# Allegro board netduino2_20Dec16_0600.brd
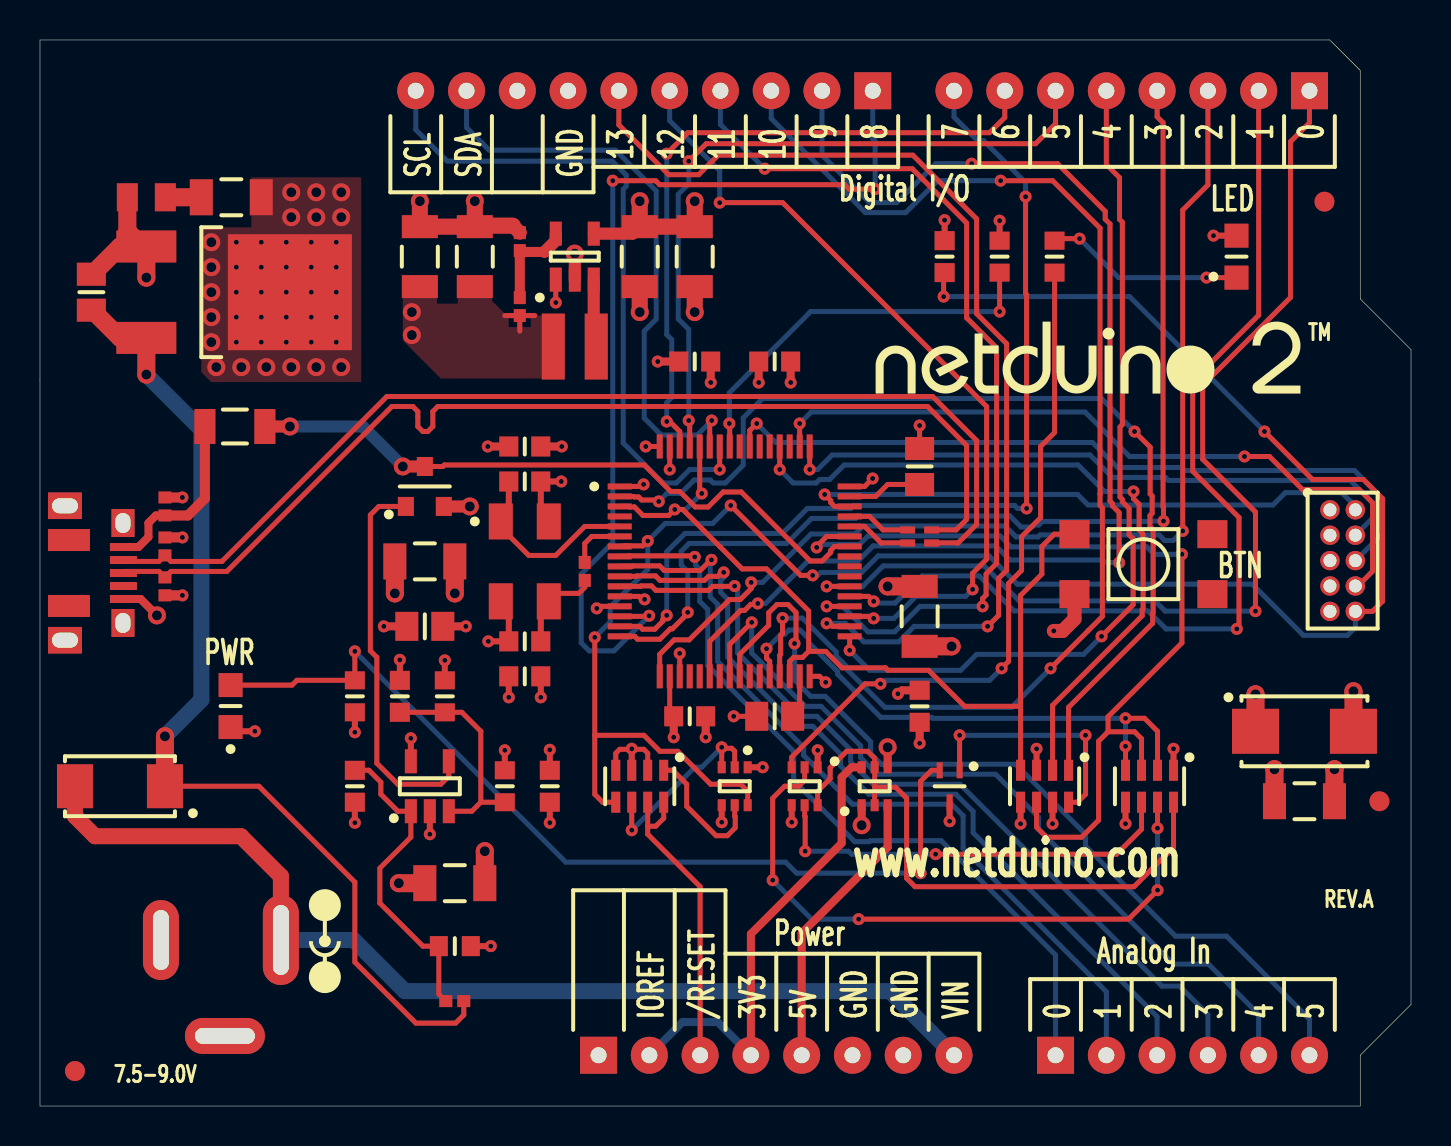
[diagram p0: board, top side]
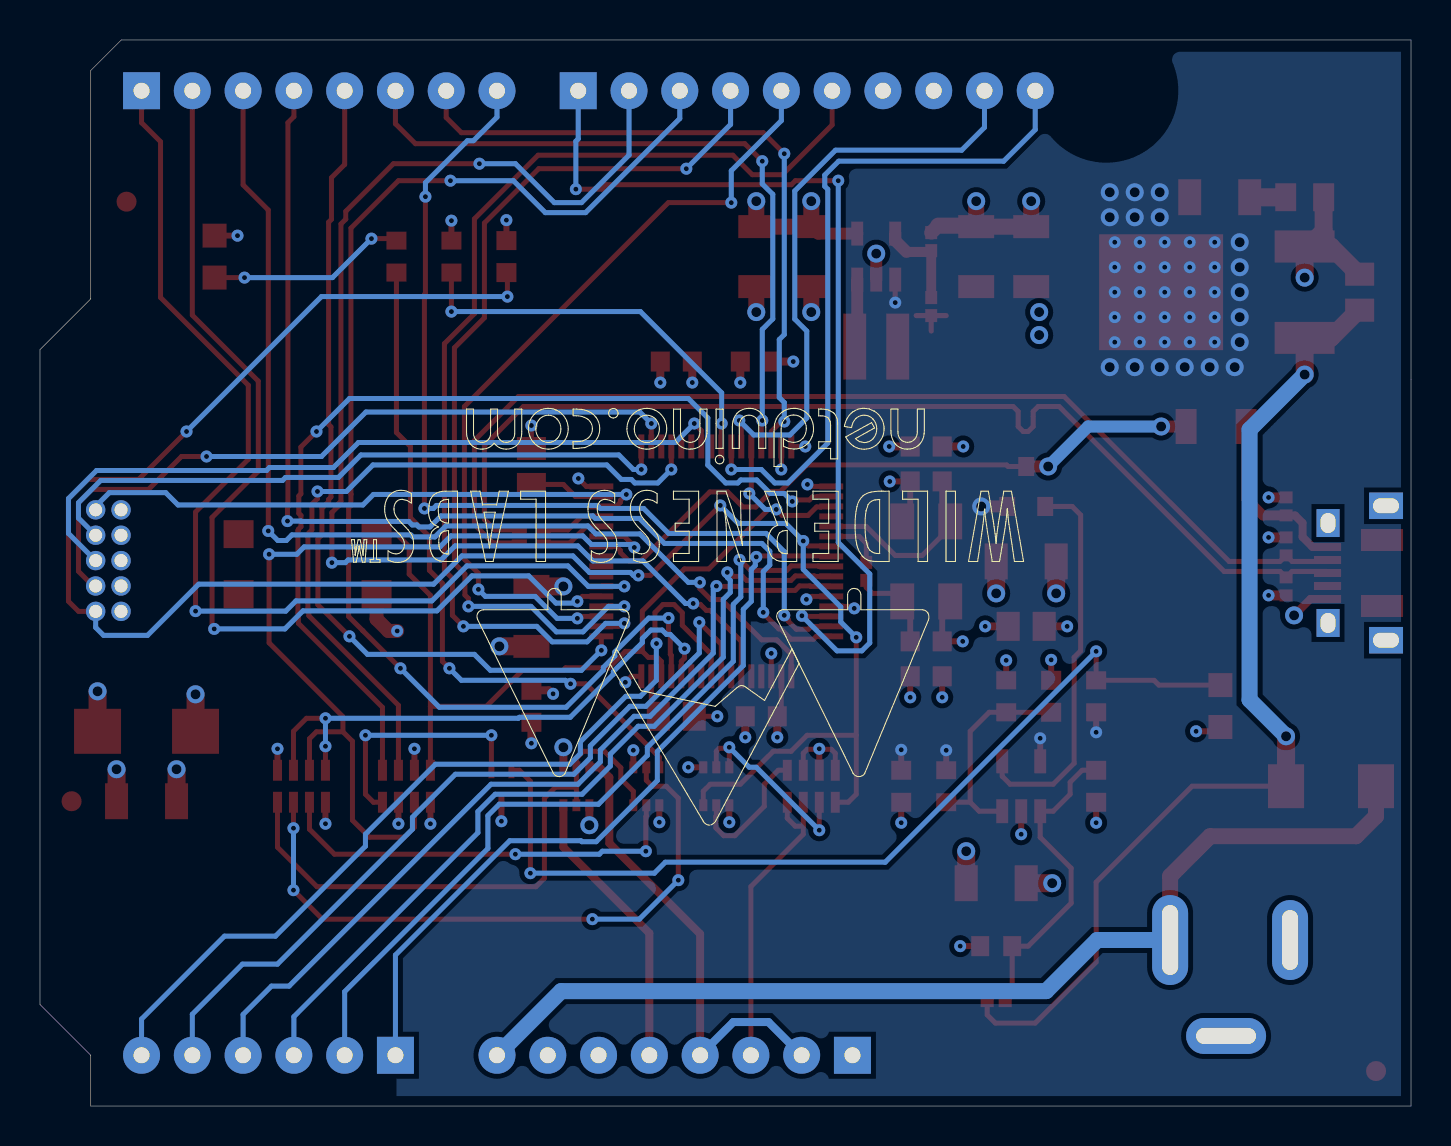
[diagram p1: board, bottom side, seen from below]

Outline 68.58 x 53.34 mm; copper layers: TOP, L2-GND, L3-PWR, BOTTOM. Coordinates in mm from the lower left corner of the outline.
Outline path: 0,53.34 0,0 66.04,0 66.04,2.54 68.58,5.08 68.58,37.85 66.04,40.39 66.04,51.82 64.52,53.34 0,53.34

## Placement (name value [footprint] x y rotation side)
C1  0.47uF  [CAPC2012X125N]  2.57 40.72 90 top
C2  10uF  [CAPC3216X180N]  9.57 45.47 180 top
C3  0.1uF  [CAPC1608X90N]  18 20.5 90 top
C4  0.1uF  [CAPC1608X90N]  25.5 16 270 top
C5  10uF  [CAPC3216X180N]  30 42.5 270 top
C6  10uF  [CAPC3216X180N]  32.75 42.5 270 top
C7  10uF  [CAPC3216X180N]  21.75 42.5 90 top
C8  10uF  [CAPC3216X180N]  19 42.5 90 top
C9  0.1uF  [CAPC1608X90N]  15.75 16 270 top
C10  0.1uF  [CAPC1608X90N]  24.25 33 180 top
C11  0.1uF  [CAPC1608X90N]  32.5 19.5 180 top
C12  0.1uF  [CAPC1608X90N]  44 20 270 top
C13  0.1uF  [CAPC1608X90N]  36.75 37.25 0 top
C14  0.1uF  [CAPC1608X90N]  32.75 37.25 180 top
C15  10uF  [CAPC3216X180N]  44 24.5 90 top
C16  10uF  [CAPC3216X180N]  20.75 11.15 0 top
C17  10uF  [CAPC3216X180N]  19.25 27.25 0 top
C18  2.2uF  [CAPC2012X125N]  44 32 90 top
C19  2.2uF  [CAPC2012X125N]  36.75 19.5 180 top
C20  0.1uF  [CAPC1608X90N]  24.25 21.5 180 top
C21  1uF  [CAPC2012X125N]  19.25 24 180 top
C22  0.1uF  [CAPC1608X90N]  45.25 42.5 90 top
C23  18pF  [CAPC1608X90N]  24.25 31.25 0 top
C24  18pF  [CAPC1608X90N]  24.25 23.25 180 top
C25  100uF  [CAPMP6032X280N]  63.25 18.75 0 top
C26  10uF  [CAPC3216X180N]  63.25 15.25 0 top
D1  -  [SS15-TP]  4 16 180 top
D2  WHITE  [LEDC2012X110N]  9.53 20.01 90 top
D3  BLUE  [LEDC2012X110N]  59.85 42.5 90 top
D4  PGB1010402KR  [RESC1005X40AN]  6.25 30 90 top
D5  PGB1010402KR  [RESC1005X40AN]  6.25 28 90 top
D6  PGB1010402KR  [RESC1005X40AN]  6.25 26 270 top
F1  1206L050YR  [RESC3216X100N]  9.75 34 0 top
F2  FID_1-00_X_2-00  [FID_1-00_X_1-50]  1.75 1.75 0 top
F3  FID_1-00_X_2-00  [FID_1-00_X_1-50]  67 15.25 0 top
F4  FID_1-00_X_2-00  [FID_1-00_X_1-50]  64.25 45.25 0 top
J1  HEADER 3  [ADC-002A-1]  -1.75 8.31 90 top
J2  HDR100IMP08F-G-V-TH-BLUE  [HDR100IMP08F-G-V-TH]  63.5 50.8 180 top
J3  -  [DX4R005JJ2R1800]  0 26.67 270 top
J4  HDR100IMP08F-G-V-TH-BLUE  [HDR100IMP10F-G-V-TH]  41.66 50.8 180 top
J5  HDR100IMP08F-G-V-TH-BLUE  [HDR100IMP06F-G-V-TH]  50.8 2.54 0 top
J6  HDR100IMP08F-G-V-TH-BLUE  [HDR100IMP08F-G-V-TH]  27.94 2.54 0 top
J7  MINI_JTAG_SMD  [MINI_JTAG_TH]  65.16 27.29 0 top
L1  2.2uH  [LQH3NPN2R2NM0L]  26.75 38 180 top
MT1  -  [MTG320H720NP]  15.24 50.8 0 top
MT2  -  [MTG320H720NP]  66.04 35.56 0 top
MT3  -  [MTG320H720NP]  66.04 7.62 0 top
NOREF  -  []  14.25 8.25 90 top
NOREF#2  -  []  0 53.34 0 top
NOREF#3  -  []  0 0 90 top
NOREF#4  -  []  41.8 35.65 0 top
Q1  MMBT3906TT1G  [SOT50P160X90-3N]  45.5 16 270 top
Q2  -  [MBT3904DW1T1G]  34.75 16 270 top
Q3  -  [MBT3904DW1T1G]  38.25 16 270 top
Q4  -  [NTR4101PT1G]  19.25 31 90 top
Q5  -  [NTJD4152PT1G]  41.75 16 90 top
R2  1.5K  [RESC1608]  15.75 20.5 90 top
R3  1K  [RESC2012X70N]  5.32 45.47 0 top
R4  10K  [RESCAV80P160X320X70-8N]  30 16 270 top
R6  1K  [RESC1608]  50.75 42.5 270 top
R8  14K  [CAPC1005X55N]  20.75 5.25 180 top
R9  162K  [CAPC1005X55N]  24 40 90 top
R10  36K  [CAPC1005X55N]  24 43.25 90 top
R11  10K  [RESCAV80P160X320X70-8N]  55.5 16 270 top
R12  10K  [RESCAV80P160X320X70-8N]  50.25 16 270 top
R13  390  [CAPC1005X55N]  27.25 26.75 90 top
R14  22  [EXB24V]  44 28.5 180 top
R27  10K  [RESC1608]  20.25 20.5 90 top
R28  10K  [RESC1608]  20.75 8 0 top
R31  10K  [RESC1608]  23.25 16 270 top
R32  10K  [RESC1608]  48 42.5 270 top
SW1  -  [TSXH-2GL]  55.2 27.11 180 top
U1  MC33269DT-5.0G  [MC33269DT]  5.32 40.72 0 top
U2  -  [ST1S12GR]  26.75 42.5 90 top
U3  LMV7271MF/NOPB  [SOT95P280X145-5N]  19.5 16 90 top
U4  STM32F205RFT6  [STM32F405RGT6]  34.75 27.25 0 top
Y1  25000Mhz  [ABM3B]  24.25 27.25 270 top

## Library data of the parts
C1-C26 = C
D1 = D05AZ75_2
D2 = LED_2
D3 = LED_1
D4-D6 = D05AZ75_1
F1 = FUSE
F2-F4 MT1-MT3 = MOUNT_HOLE
J1 = HEADER 3
J2 J6 = HEADER 8
J3 = HEADER 11_0
J4 = HEADER 10
J5 = HEADER 6
J7 = HEADER 10_2
L1 = L
Q1 = 2N1132_0
Q2 Q3 = MUN5215DW1T1G_6
Q4 = NDF0610/TO_1
Q5 = NTJD4152PT1G
R2 R3 R6 R8-R10 R13 R27 R28 R31 R32 = R
R4 R11 R12 = RESCAV50P80X160X60-8N
R14 = EXB24V
SW1 = SW PUSHBUTTON-SPST-2_0
U1 = LM7805/TO_2
U2 = HEADER 5_2
U3 = LMV321/SO
U4 = STM32F427_2
Y1 = CRYSTAL_0

## Footprints (pads in the part's own frame, mm; a bottom-side part is the same pattern mirrored in y, then rotated)
ABM3B
  rect 1.8x1.2 smd: 1(-2,-1.2) 2(2,-1.2) 3(2,1.2) 4(-2,1.2)
ADC-002A-1
  oval 4.5x1.8 hole 3.5x0.8: 1(0,-13.8)
  oval 1.8x4 hole 0.8x3: 2(-4.8,-11)
  oval 4x1.8 hole 3x0.8: 3(0,-7.8)
CAPC1005X55N
  rect 0.65x0.6 smd: 1(-0.45,0) 2(0.45,0)
CAPC1608X90N
  rect 0.95x1.001 smd: 1(-0.8,0) 2(0.8,0)
CAPC2012X125N
  rect 1.15x1.45 smd: 1(-0.9,0) 2(0.9,0)
CAPC3216X180N
  rect 1.15x1.8 smd: 1(-1.5,0) 2(1.5,0)
CAPMP6032X280N
  rect 2.35x2.25 smd: 1(-2.45,0) 2(2.45,0)
DX4R005JJ2R1800
  rect 0.4x1.35 smd: 1(-1.3,4.175) 2(-0.65,4.175) 3(0,4.175) 4(0.65,4.175) 5(1.3,4.175)
  rect 1.4x1.15 hole 1x0.75: 6(-2.5,4.15) 7(2.5,4.15)
  rect 1.325x1.7 hole 0.75x1.3: 8(-3.362,1.25) 11(3.362,1.25)
  rect 1.1x2.1 smd: 9(-1.65,1.45) 10(1.65,1.45)
EXB24V
  rect 0.75x0.35 smd: 1(-0.6,0.325) 2(-0.6,-0.325) 3(0.6,-0.325) 4(0.6,0.325)
FID_1-00_X_1-50
  round 1 smd: 1(0,0)
HDR100IMP06F-G-V-TH
  rect 1.85x1.85 hole 0.8: 1(0,0)
  round 1.85 hole 0.8: 2(2.54,0) 3(5.08,0) 4(7.62,0) 5(10.16,0) 6(12.7,0)
HDR100IMP08F-G-V-TH
  rect 1.85x1.85 hole 0.8: 1(0,0)
  round 1.85 hole 0.8: 2(2.54,0) 3(5.08,0) 4(7.62,0) 5(10.16,0) 6(12.7,0) 7(15.24,0) 8(17.78,0)
HDR100IMP10F-G-V-TH
  rect 1.85x1.85 hole 0.8: 1(0,0)
  round 1.85 hole 0.8: 2(2.54,0) 3(5.08,0) 4(7.62,0) 5(10.16,0) 6(12.7,0) 7(15.24,0) 8(17.78,0) 9(20.32,0) 10(22.86,0)
LEDC2012X110N
  rect 1.2x1.2 smd: A(1.05,0) C(-1.05,0)
LQH3NPN2R2NM0L
  rect 1.15x3.3 smd: 1(-1.075,0) 2(1.075,0)
MBT3904DW1T1G
  rect 0.6x0.4 smd: 1(-0.95,0.65) 2(-0.95,0) 3(-0.95,-0.65) 4(0.95,-0.65) 5(0.95,0) 6(0.95,0.65)
MC33269DT
  rect 3x1.6 smd: 1(0,2.286) 3(0,-2.286)
  rect 6.2x5.8 smd: 4(7.18,0)
MINI_JTAG_TH
  round 0.97 hole 0.65: 1(-0.635,2.54) 2(0.635,2.54) 3(-0.635,1.27) 4(0.635,1.27) 5(-0.635,0) 6(0.635,0) 7(-0.635,-1.27) 8(0.635,-1.27) 9(-0.635,-2.54) 10(0.635,-2.54)
MTG320H720NP
  round 0 hole 3.2 unplated: (0,0)
NTJD4152PT1G
  rect 0.6x0.4 smd: 1(-0.95,0.65) 2(-0.95,0) 3(-0.95,-0.65) 4(0.95,-0.65) 5(0.95,0) 6(0.95,0.65)
NTR4101PT1G
  rect 0.95x0.8 smd: 1(-1,0.95) 2(-1,-0.95) 3(1,0)
RESC1005X40AN
  rect 0.6x0.65 smd: 1(-0.45,0) 2(0.45,0)
RESC1608
  rect 0.899x1.001 smd: 1(-0.8,0) 2(0.8,0)
RESC2012X70N
  rect 1.05x1.4 smd: 1(-0.95,0) 2(0.95,0)
RESC3216X100N
  rect 1.05x1.75 smd: 1(-1.5,0) 2(1.5,0)
RESCAV80P160X320X70-8N
  rect 1.05x0.45 smd: 1(-0.8,1.2) 2(-0.8,0.4) 3(-0.8,-0.4) 4(-0.8,-1.2) 5(0.8,-1.2) 6(0.8,-0.4) 7(0.8,0.4) 8(0.8,1.2)
SOT50P160X90-3N
  rect 0.8x0.3 smd: 1(-0.8,0.5) 2(-0.8,-0.5) 3(0.8,0)
SOT95P280X145-5N
  rect 1.2x0.6 smd: 1(-1.25,0.95) 2(-1.25,0) 3(-1.25,-0.95) 4(1.25,-0.95) 5(1.25,0.95)
SS15-TP
  rect 1.8x2.2 smd: A(2.25,0) C(-2.25,0)
ST1S12GR
  rect 1.2x0.6 smd: 1(-1.15,0.95) 2(-1.15,0) 3(-1.15,-0.95) 4(1.15,-0.95) 5(1.15,0.95)
STM32F405RGT6
  rect 1.2x0.3 smd: 1(-5.75,3.75) 2(-5.75,3.25) 3(-5.75,2.75) 4(-5.75,2.25) 5(-5.75,1.75) 6(-5.75,1.25) 7(-5.75,0.75) 8(-5.75,0.25) 9(-5.75,-0.25) 10(-5.75,-0.75) 11(-5.75,-1.25) 12(-5.75,-1.75) 13(-5.75,-2.25) 14(-5.75,-2.75) 15(-5.75,-3.25) 16(-5.75,-3.75) 33(5.75,-3.75) 34(5.75,-3.25) 35(5.75,-2.75) 36(5.75,-2.25) 37(5.75,-1.75) 38(5.75,-1.25) 39(5.75,-0.75) 40(5.75,-0.25) 41(5.75,0.25) 42(5.75,0.75) 43(5.75,1.25) 44(5.75,1.75) 45(5.75,2.25) 46(5.75,2.75) 47(5.75,3.25) 48(5.75,3.75)
  rect 0.3x1.2 smd: 17(-3.75,-5.75) 18(-3.25,-5.75) 19(-2.75,-5.75) 20(-2.25,-5.75) 21(-1.75,-5.75) 22(-1.25,-5.75) 23(-0.75,-5.75) 24(-0.25,-5.75) 25(0.25,-5.75) 26(0.75,-5.75) 27(1.25,-5.75) 28(1.75,-5.75) 29(2.25,-5.75) 30(2.75,-5.75) 31(3.25,-5.75) 32(3.75,-5.75) 49(3.75,5.75) 50(3.25,5.75) 51(2.75,5.75) 52(2.25,5.75) 53(1.75,5.75) 54(1.25,5.75) 55(0.75,5.75) 56(0.25,5.75) 57(-0.25,5.75) 58(-0.75,5.75) 59(-1.25,5.75) 60(-1.75,5.75) 61(-2.25,5.75) 62(-2.75,5.75) 63(-3.25,5.75) 64(-3.75,5.75)
TSXH-2GL
  rect 1.5x1.4 smd: 1(-3.45,1.5) 2(3.45,1.5) 3(-3.45,-1.5) 4(3.45,-1.5)

## Nets
+3.3V: C7.1 C8.1 C10.1 C11.1 C12.1 C13.1 C14.1 C15.1 C16.1 C17.1 C20.1 C21.1 C25.1 C26.1 J7.1(VCC) L1.2 Q5.1(SOURCE) R4.2(1) R4.3(1) R4.4(1) R9.1 R12.3(1) R32.1 SW1.2 U4.1(VBAT) U4.13(VDDA) U4.19(VDD1) U4.32(VDD2) U4.48(VDD3) U4.64(VDD4)
+3V3_HEADER: J6.2 J6.4 Q5.6(DRAIN)
+5.0V: C2.1 C4.1 C5.1 C6.1 D3.A(ANODE) Q4.2(SOURCE) Q5.4(SOURCE) R2.1 R11.1 R31.1 U1.4(VOUT) U2.1(EN) U2.4(VIN) U3.5(+VCC)
+5V_HEADER: J6.5 Q5.3(DRAIN)
+VIN: D1.A(1) J1.1 J6.8
+VIN_PROTECTED: C1.1 D1.C(2) R8.1 U1.3(VIN)
GND: C1.2 C3.2 C4.2 C5.2 C6.2 C7.2 C8.2 C9.2 C10.2 C11.2 C12.2 C13.2 C14.2 C15.2 C16.2 C17.2 C18.2 C19.2 C20.2 C21.2 C22.2 C23.2 C24.2 C25.2 C26.2 D2.C(CATHODE) D4.2 D5.2 D6.2 J1.2 J1.3 J3.5(GND) J4.7 J6.6 J6.7 J7.3(GND1) J7.5(GND2) J7.7(GND3) J7.9(GND4) Q1.3(COLLECTOR) Q2.1(E) Q2.4(E) Q3.1(E) Q3.4(E) R3.1 R10.2 R11.5(2) R12.5(2) R12.7(2) R27.2 R28.2 U1.1(GND) U2.2(GND) U3.2(-VCC) U4.12(VSSA) U4.18(VSS1) U4.63(VSS2) Y1.2 Y1.4
VIN_COMP: C9.1 R8.2 R28.1 U3.1(+VIN)
VIN_COMP_LOGIC: Q4.1(GATE) U3.4(OUT)
VIN_REF: C3.1 R27.1 R31.2 U3.3(-VIN)
/EXTERNAL_RESET: J6.3 R4.7(2) R4.8(2)
/PWR_CTRL_HEADERS: Q3.6(C) Q5.2(GATE) Q5.5(GATE) R11.8(2)
/PWR_LED_OFF: R12.1 U4.2(PC13)
/RESET_MCU: C22.1 J7.10(NRST) Q2.6(C) R4.5(2) U4.7(\\R\S\T)
A0: J5.1 U4.8(PC0)
A1: J5.2 U4.9(PC1)
A2: J5.3 U4.10(PC2)
A3: J5.4 U4.11(PC3)
A4: J5.5 U4.24(PC4)
A5: J5.6 U4.25(PC5)
CTRL_OF_PWR_HEADERS: R11.2(1) R11.4(1) U4.28(PB2/BOOT1)
D0: J2.1 U4.38(PC7/TIM3_CH2)
D1: J2.2 U4.37(PC6/TIM3_CH1)
D2: J2.3 U4.17(PA3/USART2_RX)
D3: J2.4 U4.16(PA2/USART2_TX)
D4: J2.5 U4.33(PB12)
D5: J2.6 U4.61(PB8/TIM4_CH3)
D6: J2.7 U4.62(PB9/TIM4_CH4)
D7: J2.8 U4.15(PA1/USART4_RX)
D8: J4.1 U4.14(PA0/USART4_TX)
D9: J4.2 U4.22(PA6/SPI1_MISO)
D10: J4.3 U4.29(PB10/USART3_TX)
D11: J4.4 U4.36(PB15/SPI2_MOSI)
D12: J4.5 U4.35(PB14/SPI2_MISO)
D13: J4.6 U4.34(PB13/SPI2_SCK)
DCDC_FB: R9.2 R10.1 U2.5(FB)
JTCK: J7.4(JTCK) U4.49(PA14/JTCK-SWCLK)
JTDI: J7.8(JTDI) U4.50(PA15/JTDI)
JTDO: J7.6(JTDO) U4.55(PB3/JTDO/TRACESW0)
JTMS: J7.2(JTMS) U4.46(PA13/JTMS-SWDIO)
LED: R11.3(1) R12.6(2) U4.43(PA10/OTG_FS_ID)
OSC_IN: C23.1 U4.5(PH0/OSC_IN) Y1.1
OSC_OUT: R13.2 U4.6(PH1/OSC_OUT)
OTG_FS_DM: R14.4(2) U4.44(PA11/OTG_FS_DM)
OTG_FS_DP: R14.3(2) U4.45(PA12/OTG_FS_DP)
SCL: J4.10 U4.58(PB5/CAN2_TX/TIM4_CH1)
SDA: J4.9 U4.59(PB7/TIM4_CH2)
SWITCH1: R12.4(1) SW1.4 U4.3(PC14) U4.30(PB11/USART3_RX) U4.60(BOOT0)
USB5V: D4.1 F1.1 J3.1(VBUS)
USB5V_F: F1.2 Q4.3(DRAIN) U4.42(PA9/OTG_FS_VBUS)
USB_D+: D6.1 J3.3(D+) R14.2(1)
USB_D-: D5.1 J3.2(D-) R14.1
VCAP_1: C19.1 U4.31(VCAP_1)
VCAP_2: C18.1 U4.47(VCAP_2)
N62753: Q2.2(B) Q2.3(C) R4.6(2)
N62801: D3.C(CATHODE) R6.1
N63121: C24.1 R13.1 Y1.3
N63233: C2.2 R3.2
N74908: Q3.3(C) R6.2
N236614: D2.A(ANODE) Q1.2(EMITTER) R2.2
N237577: Q1.1(BASE) R12.8(2)
N238352: Q3.5(B) R11.6(2)
N238638: Q2.5(B) R4.1
N251644: Q3.2(B) R11.7(2)
N267238: R12.2(1) U4.52(PC11/USART3_RX)
N269112: R32.2 U4.57(PB5/CAN2_RX/SPI3_MOSI)
N1930270: L1.1 U2.3(SW)

Pads without a net: F2 1; F3 1; F4 1; J3 4 6 7 8 9 10 11; J4 8; J6 1; SW1 1 3; U4 4 20 21 23 26 27 39 40 41 51 53 54 56

## Via types
v1: diameter 0.6, hole 0.25, TOP to BOTTOM, 163 vias
v2: diameter 0.9, hole 0.5, TOP to BOTTOM, 45 vias

## Routing (per net, layer and track width the routed paths; a pad name or vN(x,y) marks a point on that pad's centre or on a via; arc(x,y) is an arc through that point)
+3.3V: length 34.5
  TOP w0.25: U4.1 30.09,31 v1(30.19,31.1) ; U4.32 39,21.5 v1(39.3,21.2) ; v1(41.65,31.4) 41.25,31 U4.48 ; R4.2 30.4,17.65 30.2,17.85 29.62,17.85 v1(29.6,17.88) 29.57,17.85 29,17.85 28.8,17.65 R4.4 ; v1(27.85,24.9) 27.95,25 U4.13 ; U4.19 v1(32,22.65) ; U4.64 v1(30.3,33)
  TOP w0.254: 23.25,39.55 R9.1 ; R9.1 24,38.78 ; R9.1 24.75,39.55
  TOP w0.3: C20.1 v1(25.05,20.45) ; R12.3 v1(49.85,17.88) ; R32.1 v1(48,44.3) ; R4.3 v1(29.6,17.88)
  TOP w0.4: Q5.1 v2(41.1,14.05) ; C11.1 v1(33.3,18.45) ; C10.1 v1(26.1,33) ; C14.1 v1(33.55,36.2) ; v1(42.91,20.63) 42.95,20.63 43.12,20.8 C12.1 ; C13.1 v1(35.95,36.2) ; C21.1 v1(21.3,24)
  TOP w0.7: v1(50.71,23.77) 51.15,23.77 51.74,24.36 SW1.2
  TOP w0.9: C26.1 v2(61.75,16.85) ; C16.1 v2(17.95,11.15) ; C25.1 v2(60.8,20.6) ; C15.1 v2(45.6,23) ; C17.1 v2(17.75,25.65)
  vias: v2(18.6,39.73) v2(18.6,38.58)
+3V3_HEADER: length 23.5
  TOP w0.4: J6.4 35.56,8.61 40.1,13.15 40.1,16.45 40.6,16.95 Q5.6
  BOTTOM w0.4: J6.4 33.9,4.2 32.14,4.2 J6.2
+5.0V: length 17.6
  TOP w0.25: U2.1 v1(25.8,40.2)
  TOP w0.3: R11.1 v1(56.7,17.88) ; D3.A v1(58.7,43.55) ; R31.1 v1(23.25,17.8) ; U3.5 v1(18.55,18.4) ; C4.1 v1(25.5,17.82) ; R2.1 v1(15.75,18.7)
  TOP w0.4: Q5.4 v2(42.4,17.95)
  TOP w0.6: C5.1 29.65,43.65 U2.4 ; Q4.2 v2(21.5,30)
  TOP w0.8: v2(30,45.27) C5.1 C6.1 v2(32.75,45.27)
  vias: v1(9.82,43.22) v1(9.82,41.97) v1(9.82,40.72) v1(9.82,39.47) v1(9.82,38.22) v1(11.07,43.22) v1(11.07,41.97) v1(11.07,40.72) v1(11.07,39.47) v1(11.07,38.22) v1(12.32,43.22) v1(12.32,41.97) v1(12.32,40.72) v1(12.32,39.47) v1(12.32,38.22) v1(13.57,43.22) v1(13.57,41.97) v1(13.57,40.72) v1(13.57,39.47) v1(13.57,38.22) v1(14.82,43.22) v1(14.82,41.97) v1(14.82,40.72) v1(14.82,39.47) v1(14.82,38.22) v2(8.57,43.22) v2(8.57,41.97) v2(8.57,40.72) v2(8.57,39.47) v2(8.57,38.22) v2(8.82,36.97) v2(10.07,36.97) v2(11.32,36.97) v2(12.57,45.72) v2(12.57,44.47) v2(12.57,36.97) v2(13.82,45.72) v2(13.82,44.47) v2(13.82,36.97) v2(15.07,45.72) v2(15.07,44.47) v2(15.07,36.97)
+5V_HEADER: length 14.3
  TOP w0.4: Q5.3 42.4,12.95 38.1,8.65 J6.5
+VIN: length 52.3
  TOP w0.8: D1.A 1.75,14.5 2.75,13.5 10.05,13.5 12.05,11.5 J1.1
  BOTTOM w0.8: J1.1 15.69,8.31 18.25,5.75 42.51,5.75 J6.8
+VIN_PROTECTED: length 50.7
  TOP w0.25: R8.1 21.2,4.56 20.79,4.15 18.8,4.15 15.75,7.2 15.75,11.2 10.95,16 D1.C
  TOP w0.9: C1.1 2.62,39.82 4.01,38.43 U1.3 v2(5.32,36.6) ; D1.C v2(6.25,18.5)
  BOTTOM w0.8: v2(5.32,36.6) 8.07,33.84 8.07,20.32 v2(6.25,18.5)
GND: length 69
  TOP w0.25: C11.2 31.5,19.7 U4.18 ; v1(30.24,25.35) 30.18,25.41 30.05,25.41 29.96,25.5 U4.12 ; U4.63 v1(31.5,31.85) ; C19.2 v1(34.7,19.5) ; C18.2 v1(44,34.05)
  TOP w0.3: R11.5 v1(54.3,14.12) ; Y1.4 25.05,29.65 C23.2 v1(26.07,31.25) ; U3.2 v1(19.5,13.6) ; Q3.1 v1(38.9,17.8) ; C20.2 v1(23.45,20.45) ; Y1.2 23.45,24.85 C24.2 v1(22.43,23.25) ; C3.2 v1(18,22.32) ; D2.C 9.75,18.75 v1(10.75,18.75) ; Q2.4 v1(34.1,14.2) ; Q1.3 v1(45.5,14.25) ; C4.2 v1(25.5,14.18) ; R27.2 v1(20.25,22.3) ; R28.2 v1(22.55,8) ; C22.2 v1(45.25,44.33) ; Q3.4 v1(37.6,14.2) ; R12.5 v1(49.05,14.12) ; Q2.1 v1(36.15,16.95) ; C9.2 v1(15.75,14.18) ; R12.7 v1(50.65,14.12)
  TOP w0.4: C21.2 v1(17.2,24) ; v2(5.85,24.55) 5.03,25.37 J3.5 ; C14.2 v1(30.9,37.25) ; C10.2 v1(22.4,33) ; C12.2 v1(44,18.15) ; C11.2 v1(31.7,18.45) ; C13.2 v1(37.55,36.2)
  TOP w0.5: D4.2 v1(7.12,30.45) ; D5.2 v1(7.12,28.45) ; D6.2 v1(7.12,25.55)
  TOP w0.6: U2.2 v2(26.75,42.65)
  TOP w0.7: R10.2 23.65,44.05
  TOP w0.8: C7.2 v2(21.75,45.27) ; C7.2 C8.2 v2(19,45.27) ; C7.2 21.8,44.05 23.65,44.05 ; C6.2 v2(32.75,39.73) ; C5.2 v2(30,39.73)
  TOP w0.9: C16.2 v2(22.25,12.75) ; R3.1 4.37,43.77 5.13,43.01 ; C17.2 v2(20.75,25.65) ; 5.13,43.01 U1.1 v2(5.32,41.45) ; 5.13,43.01 4.01,43.01 2.62,41.62 C1.2 ; C26.2 v2(64.75,16.85) ; C15.2 v2(42.4,26) ; C25.2 v2(65.7,20.75)
VIN_COMP: length 16
  TOP w0.25: C9.1 16.45,16.8 17.05,16.2 17.05,15.6 17.9,14.75 U3.1 18.55,13.45 17,11.9 17,10.15 19.15,8 R28.1 19.95,5.6 R8.2
VIN_COMP_LOGIC: length 19.5
  TOP w0.25: U3.4 20.45,16.5 20.05,16.1 17.9,16.1 16.85,17.15 16.85,22.45 16.52,22.77 16.52,29.57 16.95,30 Q4.1
VIN_REF: length 11
  TOP w0.25: 22.05,15.2 R31.2 ; 22.05,15.2 22.05,18.75 21.1,19.7 R27.1 C3.1 ; 22.05,15.2 21.6,14.75 U3.3
/EXTERNAL_RESET: length 15.5
  TOP w0.25: R4.8 31.2,14.4 30.8,14 30.4,14 ; 30.4,14 R4.7 ; 30.4,14 30.4,13.6 33.02,10.98 J6.3
/PWR_CTRL_HEADERS: length 29.6
  TOP w0.25: R11.8 56.7,12.95 54.73,10.97 43.77,10.97 43.35,11.4 43.35,15.4 42.8,15.95 41.75,15.95 ; Q3.6 38.9,15.75 39.52,16.38 39.52,16.93 40.35,17.75 41.4,17.75 41.75,17.4 Q5.5 41.75,15.95 ; 41.75,15.95 Q5.2
/PWR_LED_OFF: length 49.4
  TOP w0.25: R12.1 51.45,19.95 55.65,24.15 55.65,24.64 55.68,24.66 55.68,28.79 55.65,28.82 55.65,28.86 55.52,28.99 55.52,29.55 55.63,29.65 55.63,30.52 55.53,30.63 55.53,32.97 v1(54.75,33.75) ; v1(30.95,30.25) 30.88,30.32 30.09,30.32 29.94,30.48 29.72,30.48 29.7,30.5 U4.2
  BOTTOM w0.25: v1(54.75,33.75) 53.1,35.4 36.15,35.4 35.17,34.43 35.17,32.07 34.28,31.18 33.67,31.18 33.52,31.32 32.73,31.32 32.05,30.65 31.35,30.65 v1(30.95,30.25)
/RESET_MCU: length 100.7
  TOP w0.25: 27.75,18.55 30.21,18.55 31.01,17.75 31.9,17.75 33.55,16.1 35.05,16.1 35.4,15.75 Q2.6 ; 27.75,18.55 v1(27.75,23.45) ; 27.75,18.55 27.75,15.6 28.15,15.2 R4.5 ; v1(34.55,30.05) 38.05,26.55 v1(38.65,26.55) ; C22.1 45.2,41.65 v1(45.2,40.5) ; v1(61.25,33.75) 63.65,31.35 66.2,31.35 67.16,30.39 67.16,25.25 66.65,24.75 J7.10 ; U4.7 29.21,28 29.23,28.02 30.15,28.02 v1(30.4,28.27)
  BOTTOM w0.25: v1(34.55,30.05) 33.65,29.15 31.28,29.15 v1(30.4,28.27) 30.4,26.85 28.52,24.98 28.52,24.23 v1(27.75,23.45) ; v1(45.2,40.5) 54.5,40.5 v1(61.25,33.75) ; v1(38.65,26.55) 38.9,26.55 39.05,26.7 41.1,26.7 41.92,27.52 47.48,27.52 48.89,26.11 60.64,26.11 63.2,23.55 65.4,23.55 65.8,23.95 J7.10
A0: length 38.8
  TOP w0.25: U4.8 29.41,27.5 29.44,27.52 32.7,27.52 v1(32.75,27.48)
  BOTTOM w0.25: J5.1 50.8,7.55 45.08,13.28 41.52,13.28 41.48,13.22 40.76,13.22 37.7,16.28 37.7,17.74 33.4,22.04 33.4,24.85 33,25.25 33,26.85 32.8,27.05 32.8,27.43 v1(32.75,27.48)
A1: length 40.8
  TOP w0.25: U4.9 29.62,27 29.65,27.02 31,27.02 31.22,26.8 33.03,26.8 33.56,27.33 v1(33.59,27.33)
  BOTTOM w0.25: v1(33.59,27.33) 33.52,27.27 33.52,25.48 33.9,25.1 33.9,22.25 38.2,17.95 38.2,17.55 40.65,15.1 45.6,15.1 46.17,14.53 46.17,12.89 53.34,5.72 J5.2
A2: length 41.7
  TOP w0.25: v1(34.2,26.7) 34.1,26.7 33.9,26.5 33.44,26.5 33.24,26.3 31.02,26.3 30.79,26.52 29.85,26.52 29.83,26.5 U4.10
  BOTTOM w0.25: J5.3 55.88,4.47 46.67,13.68 46.67,14.74 45.81,15.6 41.46,15.6 40.05,17.01 40.05,17.6 38.65,19 37.86,19 34.4,22.46 34.4,25.35 34.05,25.7 34.05,26.3 34.2,26.45 v1(34.2,26.7)
A3: length 42.8
  TOP w0.25: v1(34.75,26.02) 34.73,26 33.64,26 33.44,25.8 30.81,25.8 30.58,26.02 30.06,26.02 30.04,26 U4.11
  BOTTOM w0.25: J5.4 58.42,4.58 57,6 56.12,6 46.02,16.1 41.67,16.1 40.55,17.22 40.55,17.81 38.86,19.5 38.06,19.5 34.9,22.66 34.9,25.86 v1(34.75,26.02)
A4: length 40.3
  TOP w0.25: U4.24 34.5,23.1 v1(35.6,24.2)
  BOTTOM w0.25: J5.5 60.96,4.59 58.45,7.1 56.7,7.1 49.95,13.85 49.95,14.45 47.8,16.6 41.88,16.6 41.05,17.43 41.05,18.02 39.07,20 38.27,20 36.06,22.21 35.6,22.67 v1(35.6,24.2)
A5: length 44.2
  TOP w0.25: U4.25 35,22.6 36.45,24.05 36.45,24.68 36.86,25.09 37.42,25.09 37.82,24.69 37.82,23.22 v1(37.74,23.14)
  BOTTOM w0.25: v1(37.74,23.14) 37.75,23.13 37.75,21.3 38.55,20.5 39.28,20.5 41.55,18.23 41.55,17.63 42.08,17.1 48.8,17.1 52.3,13.6 52.3,13 56.8,8.5 59.35,8.5 63.5,4.35 J5.6
CTRL_OF_PWR_HEADERS: length 28.2
  TOP w0.25: v1(54.3,19.4) 55.25,19.4 55.9,18.75 R11.2 ; v1(54.3,18) R11.4 ; U4.28 36.5,22.25 36.34,22.41 v1(36.34,22.88)
  BOTTOM w0.25: v1(36.34,22.88) 37.06,23.6 37.25,23.6 37.46,23.82 38.02,23.82 38.45,23.39 38.45,23.19 39.9,21.74 39.9,21.61 42.06,19.45 44.6,19.45 44.65,19.4 v1(54.3,19.4) v1(54.3,18)
D0: length 53.3
  TOP w0.25: v1(60.8,24.76) 60.8,29.72 58.16,32.36 58.16,36.07 62.55,40.45 62.55,48.25 63.5,49.2 J2.1 ; U4.38 v1(39.35,26)
  BOTTOM w0.25: v1(60.8,24.76) 56.29,24.76 55.77,25.27 48.98,25.27 47.23,27.02 42.17,27.02 41.15,26 v1(39.35,26)
D1: length 50.5
  TOP w0.25: v1(41.7,25.25) 41.45,25.5 U4.37 ; J2.2 60.96,39.57 57.66,36.27 57.66,31.76 59.98,29.45 59.98,23.98 v1(59.87,23.87)
  BOTTOM w0.25: v1(59.87,23.87) 56.33,23.87 55.42,24.77 48.73,24.77 46.98,26.52 44.13,26.52 42.77,25.17 41.78,25.17 v1(41.7,25.25)
D2: length 53.2
  TOP w0.25: v1(57.16,28.77) 57.16,44.83 58.42,46.09 J2.3 ; v1(35.58,26.2) 35.58,25.89 35.02,25.34 34.49,25.34 32.48,23.32 31.72,23.32 31,22.6 U4.17
  BOTTOM w0.25: v1(57.16,28.77) 56.68,28.3 56.26,28.3 55.98,28.57 50.02,28.57 49.92,28.48 48.83,28.48 48.27,29.02 41.17,29.02 40.77,28.62 38.57,28.62 36.15,26.2 v1(35.58,26.2)
D3: length 54.1
  TOP w0.25: v1(56.2,29.27) 56.2,29.94 56.18,29.97 56.18,49.2 55.88,49.5 J2.4 ; v1(32.4,24.7) 32.4,24.65 31.63,23.88 31.52,23.88 31.01,23.36 29.89,23.36 29.75,23.5 U4.16
  BOTTOM w0.25: v1(32.4,24.7) 32.4,26.74 32.08,27.07 32.08,27.75 32.47,28.15 37.34,28.15 38.59,29.4 40.8,29.4 40.92,29.52 48.52,29.52 49.07,28.98 49.63,28.98 49.73,29.07 49.96,29.07 50.14,29.25 55.51,29.25 55.52,29.27 v1(56.2,29.27)
D4: length 43
  TOP w0.25: U4.33 v1(40.5,22.8) ; v1(53.1,23.5) 54.68,25.08 54.68,28.38 54.48,28.58 54.48,29.9 54.14,30.24 54.14,30.35 54.02,30.47 54.02,33.98 54.14,34.1 54.14,44.22 54,44.36 54,46.45 53.34,47.11 J2.5
  BOTTOM w0.25: v1(53.1,23.5) 52.2,22.6 46.85,22.6 46.05,21.8 41.5,21.8 v1(40.5,22.8)
D5: length 35.5
  TOP w0.25: v1(32.45,34.3) 32.45,34.28 32.5,34.23 U4.61 ; v1(32.45,47.27) 33.33,48.15 49.8,48.15 50.8,49.15 J2.6
  BOTTOM w0.25: v1(32.45,47.27) 32.45,46.14 31.93,45.62 31.93,39.38 32.45,38.86 v1(32.45,34.3)
D6: length 34.2
  TOP w0.25: J2.7 48.26,49.46 47.5,48.7 32.4,48.7 v1(31.35,47.65) ; U4.62 32,33.75 31.5,34.25 v1(31.35,34.25)
  BOTTOM w0.25: v1(31.35,34.25) 31.35,35.2 31.6,35.45 31.6,38.35 31.35,38.6 v1(31.35,47.65)
D7: length 47.5
  TOP w0.25: v1(49.3,45.5) 49.3,40.65 49.35,40.6 v1(49.35,29.9) ; v1(31.35,24.55) 31.15,24.35 31.15,24.26 30.75,23.86 30.14,23.86 30,24 U4.15
  BOTTOM w0.25: J2.8 45.72,49.48 46.9,48.3 47.2,48.3 49.3,46.2 v1(49.3,45.5) ; v1(31.35,24.55) 31.35,27.74 32.26,28.65 37.14,28.65 38.39,29.9 40.55,29.9 40.7,30.05 48.75,30.05 48.9,29.9 v1(49.35,29.9)
D8: length 47.8
  TOP w0.25: v1(30.47,24.53) 30.44,24.5 U4.14 ; v1(41.77,45.88) 40.48,45.88 40.25,46.1 30.99,46.1 30.79,46.3 v1(28.65,46.3)
  BOTTOM w0.25: J4.1 41.66,48.39 41.77,48.27 v1(41.77,45.88) ; v1(30.47,24.53) 28.71,22.77 27.47,22.77 27.07,23.17 27.07,26.62 28.65,28.2 v1(28.65,46.3)
D9: length 62.6
  TOP w0.25: v1(46.6,47.15) 50.9,47.15 53.28,44.77 53.28,44.37 53.52,44.13 53.52,30.82 53.52,30.26 53.64,30.15 53.64,30.03 53.98,29.69 v1(53.98,27.19) ; v1(35.9,25.15) 35.86,25.1 35.55,25.1 35.25,24.8 35.05,24.8 33.5,23.25 U4.22
  BOTTOM w0.25: v1(46.6,47.15) 44.8,47.15 42.85,45.2 41.5,45.2 39.12,47.58 J4.2 ; v1(35.9,25.15) 36.29,25.15 38.42,27.27 40.92,27.27 41.67,28.02 47.82,28.02 48.52,27.32 53.17,27.32 53.3,27.19 v1(53.98,27.19)
D10: length 63.8
  TOP w0.25: U4.29 37,22.55 37.05,22.6 37.05,23.55 37.14,23.64 v1(37.14,24.41) ; v1(50.55,21.9) 52.42,23.77 52.42,23.78 53.14,24.5 53.14,29.94 53.02,30.06 53.02,30.61 53.02,43.93 50.65,46.3 v1(48.05,46.3)
  BOTTOM w0.25: v1(48.05,46.3) 44.9,46.3 43.3,44.7 41.29,44.7 36.58,49.41 J4.3 ; v1(50.55,21.9) 48.6,19.95 42.26,19.95 40.4,21.81 40.4,21.95 39.83,22.52 39.83,22.72 38.13,24.41 v1(37.14,24.41)
D11: length 46.1
  TOP w0.25: U4.36 v1(39.35,25) ; v1(47.15,25) 47.15,25.4 47.33,25.57 47.33,26.62 47.85,27.15 47.85,37.94 46.35,39.44 46.35,44.18 43.63,46.9 v1(36.25,46.9)
  BOTTOM w0.25: v1(47.15,25) 44.02,25 42.75,23.73 41.42,23.73 40.15,25 v1(39.35,25) ; J4.4 34.04,49.11 v1(36.25,46.9)
D12: length 40.4
  TOP w0.25: v1(41.7,24.4) 41.6,24.5 U4.35 ; v1(46.65,25.85) 46.65,26.66 47.35,27.36 47.35,35 37.15,45.2 v1(34,45.2)
  BOTTOM w0.25: J4.5 31.5,49.3 34,46.8 v1(34,45.2) ; v1(46.65,25.85) 46.3,25.5 43.81,25.5 42.71,24.4 v1(41.7,24.4)
D13: length 53.7
  TOP w0.25: U4.34 39.65,24 39.5,24.15 v1(39.35,24.15) ; v1(47.4,24) 47.95,24.55 47.95,26.4 48.35,26.8 48.35,38.15 46.85,39.65 46.85,44.39 43.66,47.58 33.92,47.58 32.95,46.6 31.45,46.6 28.96,49.09 J4.6
  BOTTOM w0.25: v1(39.35,24.15) 40.29,24.15 41.21,23.23 42.95,23.23 43.73,24 v1(47.4,24)
DCDC_FB: length 4.8
  TOP w0.5: R9.2 R10.1 24.07,42.73 25.23,42.73
  TOP w0.6: 25.23,42.73 25.8,43.3 U2.5
JTCK: length 32.6
  TOP w0.25: U4.49 v1(38.5,31.85)
  BOTTOM w0.25: J7.4 66.66,29.42 66.66,30.19 65.54,31.3 56.45,31.3 56.3,31.45 53.65,31.45 52.52,32.58 39.62,32.58 38.9,31.85 v1(38.5,31.85)
JTDI: length 36.5
  TOP w0.25: J7.8 65.92,26.02 66.66,26.75 66.66,30.19 65.99,30.85 63.15,30.85 61.5,32.5 v1(60.25,32.5) ; U4.50 v1(38,34.15)
  BOTTOM w0.25: v1(60.25,32.5) 54.5,32.5 52.27,34.73 38.58,34.73 v1(38,34.15)
JTDO: length 37.8
  TOP w0.25: v1(35.85,34.15) 35.5,33.8 U4.55
  BOTTOM w0.25: v1(35.85,34.15) 36.8,33.2 52.65,33.2 53.9,31.95 57.1,31.95 57.25,31.8 65.75,31.8 67.16,30.39 67.16,28.65 J7.6
JTMS: length 29
  TOP w0.25: v1(39.25,30.6) 39.55,30.3 39.55,30.2 39.75,30 U4.46
  BOTTOM w0.25: J7.2 65.8,30 65.11,30.69 62.29,30.69 61.67,30.07 52.43,30.07 51.9,30.6 v1(39.25,30.6)
LED: length 44.1
  TOP w0.25: R11.3 55.1,18.38 54.75,18.73 53.42,18.73 ; v1(57.12,27.61) 57.12,23.17 53.42,19.48 53.42,18.73 ; v1(38.85,27.95) 38.85,28 39.35,28.5 U4.43 ; 53.42,18.73 52.95,18.25 52.95,14.3 52.1,13.45 50.35,13.45 49.85,13.95 R12.6
  BOTTOM w0.25: v1(38.85,27.95) 39,28.1 41,28.1 41.42,28.52 48.02,28.52 48.58,27.98 55.37,27.98 55.74,27.61 v1(57.12,27.61)
OSC_IN: length 9.6
  TOP w0.25: Y1.1 23.05,28.95 24.45,27.55 25.8,27.55 27.25,29 U4.5
  TOP w0.3: Y1.1 23.45,29.65 C23.1
OSC_OUT: length 2.8
  TOP w0.25: R13.2 27.25,28.15 27.6,28.5 U4.6
OTG_FS_DM: length 3.2
  TOP w0.25: U4.44 41.25,29 42.08,28.18 R14.4
OTG_FS_DP: length 3.2
  TOP w0.25: U4.45 41.5,29.5 42.17,28.82 R14.3
SCL: length 34
  TOP w0.25: U4.58 v1(34,31.85)
  BOTTOM w0.25: J4.10 18.8,48.85 20.38,47.27 28.63,47.27 29.32,46.58 29.32,46.02 29.18,45.87 29.18,33.17 31.17,31.18 31.82,31.18 32.5,31.85 v1(34,31.85)
SDA: length 29.6
  TOP w0.25: v1(33.6,34.3) 33.5,34.2 U4.59
  BOTTOM w0.25: v1(33.6,34.3) 32.88,33.58 31.07,33.58 30.23,34.42 30.23,38.77 30.82,39.38 30.82,45.79 28.79,47.83 22.48,47.83 21.34,48.96 J4.9
SWITCH1: length 45.1
  TOP w0.25: 49.05,20 49.05,25.55 50.11,26.61 50.11,28 50.73,28.61 SW1.4 ; 49.05,20 46.25,20 44.45,21.8 42.41,21.8 42.29,21.93 40.12,21.93 39.3,22.75 38.45,22.75 ; 49.05,20 R12.4 ; v1(33.1,30.65) 33,30.75 U4.60 ; U4.30 37.5,22.25 37.7,22.45 38.15,22.45 38.45,22.75 ; 38.45,22.75 38.45,24.77 36.34,26.88 35.12,26.88 34.02,27.98 32.15,29.85 v1(31.75,29.85) 31.45,29.55 30.16,29.55 29.73,29.98 29.51,29.98 29.49,30 U4.3
  BOTTOM w0.25: v1(31.75,29.85) 32.3,29.85 v1(33.1,30.65)
USB5V: length 9.1
  TOP w0.4: D4.1 5.8,29.55 5.42,29.18 5.42,28.47 4.92,27.97 J3.1
  TOP w0.5: F1.1 8.25,30.4 7.4,29.55 D4.1
USB5V_F: length 33.1
  TOP w0.25: Q4.3 20.15,32 20.23,32.08 30.22,32.08 31.55,30.75 32,30.75 32.77,29.98 33.42,29.98 34.17,30.73 35.08,30.73 38.53,27.27 39.13,27.27 39.55,27.69 39.55,27.8 39.75,28 U4.42
  TOP w0.6: F1.2 v2(12.5,34) ; v2(18.15,32) Q4.3
  BOTTOM w0.6: v2(12.5,34) 16.15,34 v2(18.15,32)
USB_D+: length 54.3
  TOP w0.25: J3.3 4.25,26.75 5.95,26.75 D6.1 6.55,26.75 9.35,26.75 17.6,35 18.65,35 18.9,34.75 18.9,34.5 18.9,34 19.15,33.75 19.4,33.75 19.65,34 19.65,34.75 19.9,35 44.4,35 46.35,33.05 46.35,29.35 45.83,28.82 R14.2
USB_D-: length 54.1
  TOP w0.25: R14.1 45.92,28.18 46.85,29.1 46.85,33.3 44.65,35.5 17.35,35.5 9.1,27.25 6.55,27.25 D5.1 5.95,27.25 4.25,27.25 J3.2
VCAP_1: length 2.1
  TOP w0.25: U4.31 38,19.85 C19.1
VCAP_2: length 3.7
  TOP w0.25: U4.47 41.8,30.5 42.4,31.1 C18.1
N62753: length 10.2
  TOP w0.25: Q2.2 34.75,17.75 34.6,17.9 34.15,17.9 v1(34.1,17.95) Q2.3 ; v1(29.6,13.8) R4.6
  BOTTOM w0.25: v1(34.1,17.95) 33.1,16.95 32.75,16.95 v1(29.6,13.8)
N62801: length 9.9
  TOP w0.25: v1(52,43.4) 50.85,43.4 R6.1 ; D3.C v1(58.35,41.45)
  BOTTOM w0.25: v1(52,43.4) 53.95,41.45 v1(58.35,41.45)
N63121: length 4.6
  TOP w0.25: R13.1 27.25,25.95 26.95,25.65 25.85,25.65 Y1.3
  TOP w0.3: Y1.3 25.05,24.85 C24.1
N63233: length 1.8
  TOP w0.9: R3.2 C2.2
N74908: length 33.7
  TOP w0.25: v1(48.1,21.9) 48.45,22.25 48.45,26.15 49.1,26.8 49.1,28.49 50.05,29.44 50.05,33 50.75,33.7 R6.2 ; Q3.3 37.6,17.45 41.27,21.13 v1(42.04,21.13)
  BOTTOM w0.25: v1(42.04,21.13) 42.13,21.13 42.3,21.3 45.3,21.3 47.5,21.3 v1(48.1,21.9)
N236614: length 46.4
  TOP w0.25: v1(44.05,11.65) 44.05,16.25 44.6,16.8 Q1.2 ; D2.A 12.61,21.06 12.85,21.3 R2.2 v1(15.75,22.75)
  BOTTOM w0.25: v1(44.05,11.65) 37.85,11.65 37.3,12.2 26.3,12.2 v1(15.75,22.75)
N237577: length 12
  TOP w0.25: v1(52.3,18.55) 52.3,15.6 51.9,15.2 R12.8 ; Q1.1 v1(46,18.55)
  BOTTOM w0.25: v1(46,18.55) v1(52.3,18.55)
N238352: length 21.1
  TOP w0.25: Q3.5 38.25,14.5 38.27,14.48 v1(38.27,12.75) ; R11.6 55.1,13.85 53.85,12.6 v1(44.8,12.6)
  BOTTOM w0.25: v1(44.8,12.6) 40.6,12.6 40.45,12.75 v1(38.27,12.75)
N238638: length 6.9
  TOP w0.25: R4.1 31.65,16.8 32.35,16.1 32.35,15 33.82,13.53 34.38,13.53 34.77,13.92 34.77,14.48 34.75,14.5 Q2.5
N251644: length 31.8
  TOP w0.25: v1(36.65,11.3) 36.65,15.4 37.25,16 37.95,16 38.25,16.3 Q3.2 ; v1(55.9,10.8) 54.45,9.35 v1(40.95,9.35) ; R11.7 v1(55.9,13.9)
  BOTTOM w0.25: v1(40.95,9.35) 38.6,9.35 v1(36.65,11.3) ; v1(55.9,10.8) v1(55.9,13.9)
N267238: length 36.1
  TOP w0.25: R12.2 50.65,20.05 55.13,24.53 55.13,24.82 55.18,24.87 55.18,28.58 55.13,28.63 55.13,28.67 54.98,28.83 54.98,30.11 54.7,30.39 v1(54.7,30.75) ; U4.52 v1(37,31.85)
  BOTTOM w0.25: v1(54.7,30.75) 53.25,30.75 51.92,32.08 40.23,32.08 39.5,31.35 39,31.35 38.83,31.18 37.67,31.18 v1(37,31.85)
N269112: length 19.8
  TOP w0.25: v1(34.48,34.15) 34.5,34.13 U4.57 ; v1(48,39.75) R32.2
  BOTTOM w0.25: v1(48,39.75) 38.55,39.75 34.48,35.69 v1(34.48,34.15)
N1930270: length 3.4
  TOP w0.6: L1.1 27.7,38.12 U2.3

## Copper pours and planes (outline as drawn; the poured copper is in the pictures)
+3.3V on TOP: 26.2,39.55 23.35,39.55 22.6,40.3 22.6,41.5 20.9,41.5 20.9,40.15 19.85,40.15 19.85,41.5 18.15,41.5 18.15,38.3 20.05,36.4 26.2,36.4
+3.3V on L3-PWR: 23.75,40.5 24.75,39.5 26.75,39.5 27.75,40.5 39.25,40.5 43.5,44.75 49,44.75 62.5,31.25 64.75,31.25 64.75,24 63.25,24 61.5,22.25 61.5,18.5 62.25,17.75 62.25,16.5 62,16.25 60,16.25 57.25,19 52,19 50.5,17.5 49.25,17.5 47.75,19 42.25,19 41,17.75 41,15.75 41.75,15 41.75,14 41.25,13.5 33.25,13.5 28,18.75 23.25,18.75 22.5,18 22.5,14.75 18.25,10.5 17.75,10.5 16.75,11.5 16.75,15.25 19.25,17.75 19.25,19.25 17.25,21.25 17.25,26.25 20,29 21.75,29 22.5,29.75 22.5,30.75 17.75,35.5 17.75,39.75 18.5,40.5
+5.0V on TOP: 16.07,36.22 16.07,46.47 10.57,46.47 10.57,43.97 8.07,43.97 8.07,36.72 8.57,36.22
+5.0V on BOTTOM: 0.5,52.75 0.5,0.5 50.75,0.5 50.75,7.5 45,13.25 40.75,13.25 37.75,16.25 37.75,17.75 33.5,22 33.5,24.25 30.25,24.25 28.75,22.75 27.5,22.75 27,23.25 27,26.5 28.75,28.25 28.75,46.75 28.25,47.25 20.25,47.25 19,48.5 19,48.75 18.75,49 18.75,52.75
+5.0V on L2-GND: 7.75,46.5 15.75,46.5 15.75,36.25 7.75,36.25
+5.0V on L3-PWR: 0.5,52.75 0.5,0.5 65.5,0.5 65.5,2.75 68,5.25 68,37.5 65.5,40 65.5,51.5 64.25,52.75
GND on L2-GND: 0.5,52.75 0.5,0.5 65.5,0.5 65.5,2.75 68,5.25 68,37.5 65.5,40 65.5,51.5 64.25,52.75

## Text on the board
Ref Des/Silkscreen Top: 7.5-9.0V | TM | REV.A | PWR | Power | Digital I/O | Analog In | LED | BTN | SCL | SDA | GND | 13 | IOREF | 12 | /RESET | 11 | 3V3 | 10 | 5V | 9 | 8 | 7 | VIN | 6 | 5 | 0 | 4 | 1 | 3 | 2 | www.netduino.com
NCLEGEND-1-4: FIGURE | SIZE | 0.25 | 0.5 | 0.65 | 0.8 | 3.2 | 1.0x0.75 | 1.3x0.75 | 3.0x0.8 | 3.5x0.8 | DRILL CHART: TOP to BOTTOM | ALL UNITS ARE IN MILLIMETERS | TOLERANCE | +0.08/-0.08 | +0.05/-0.0 | +0.1/-0.0 | PLATED | NON-PLATED | QTY | 163 | 45 | 10 | 32 | 3 | 2 | 1
